# Altium PCB touch-24-v6-serang.PcbDoc
Units mm, origin at the board's own origin, x right, y up, seen from the top; angles counter-clockwise.
Board outline 151 x 86.38 mm, 2 copper layers (Top Layer, Bottom Layer); 92 components, 81 nets, 231 pads, 53 vias.
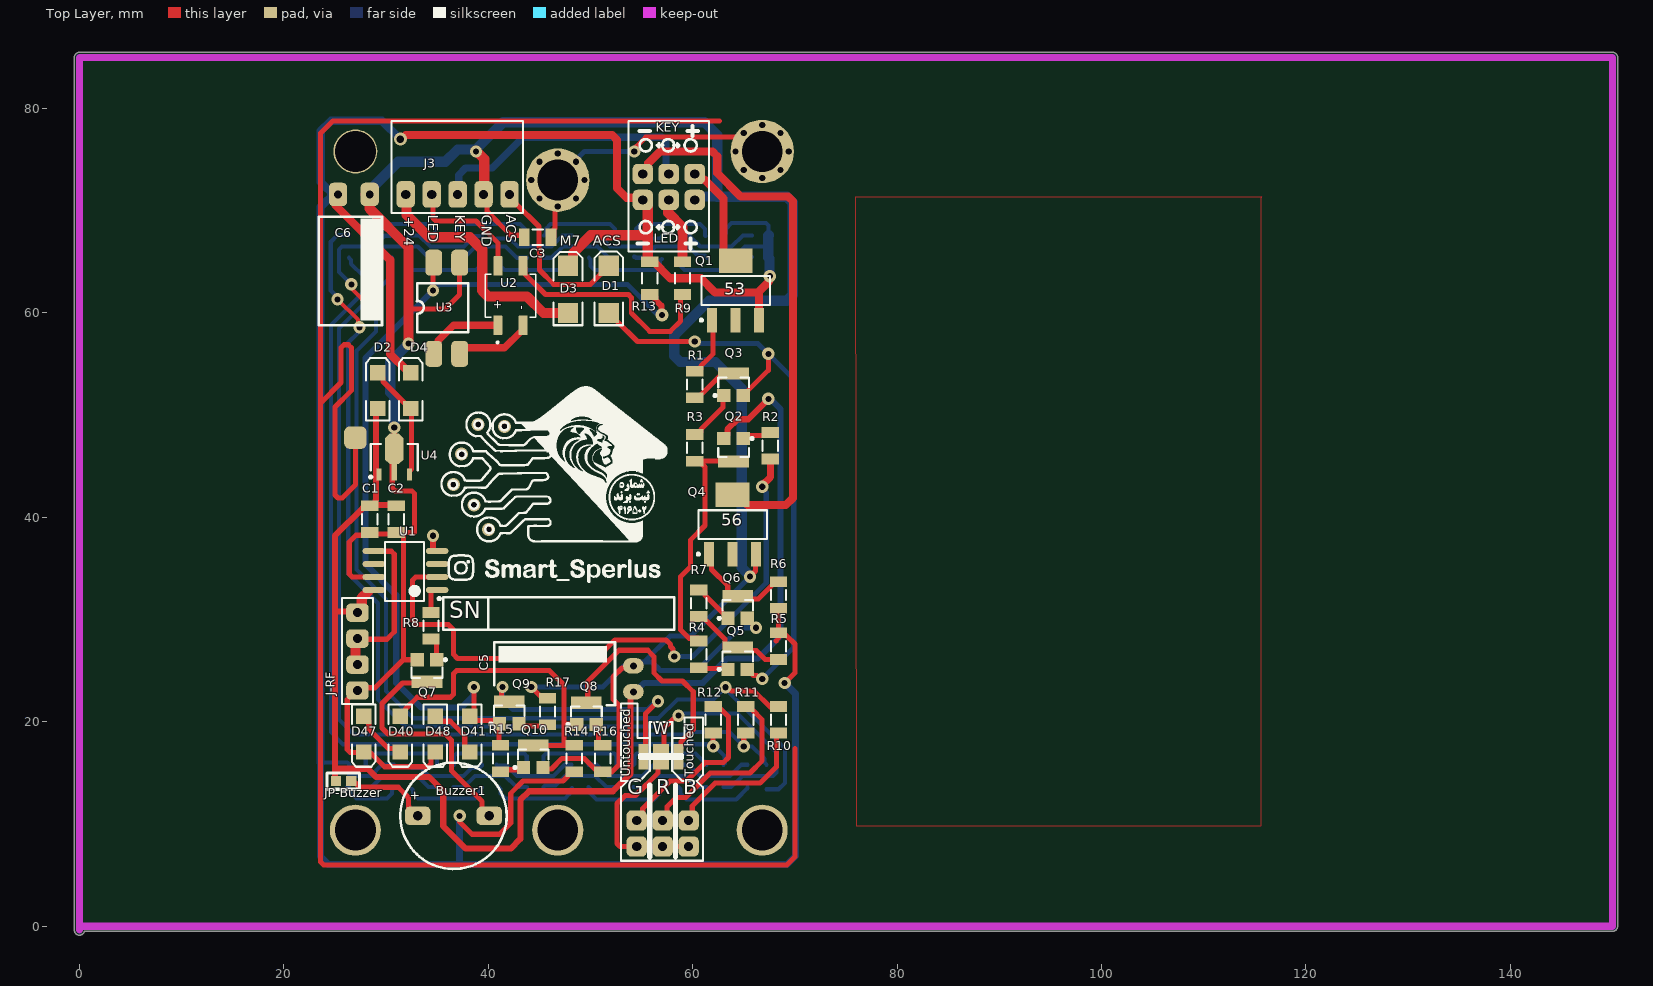
[diagram p0: Top Layer view]
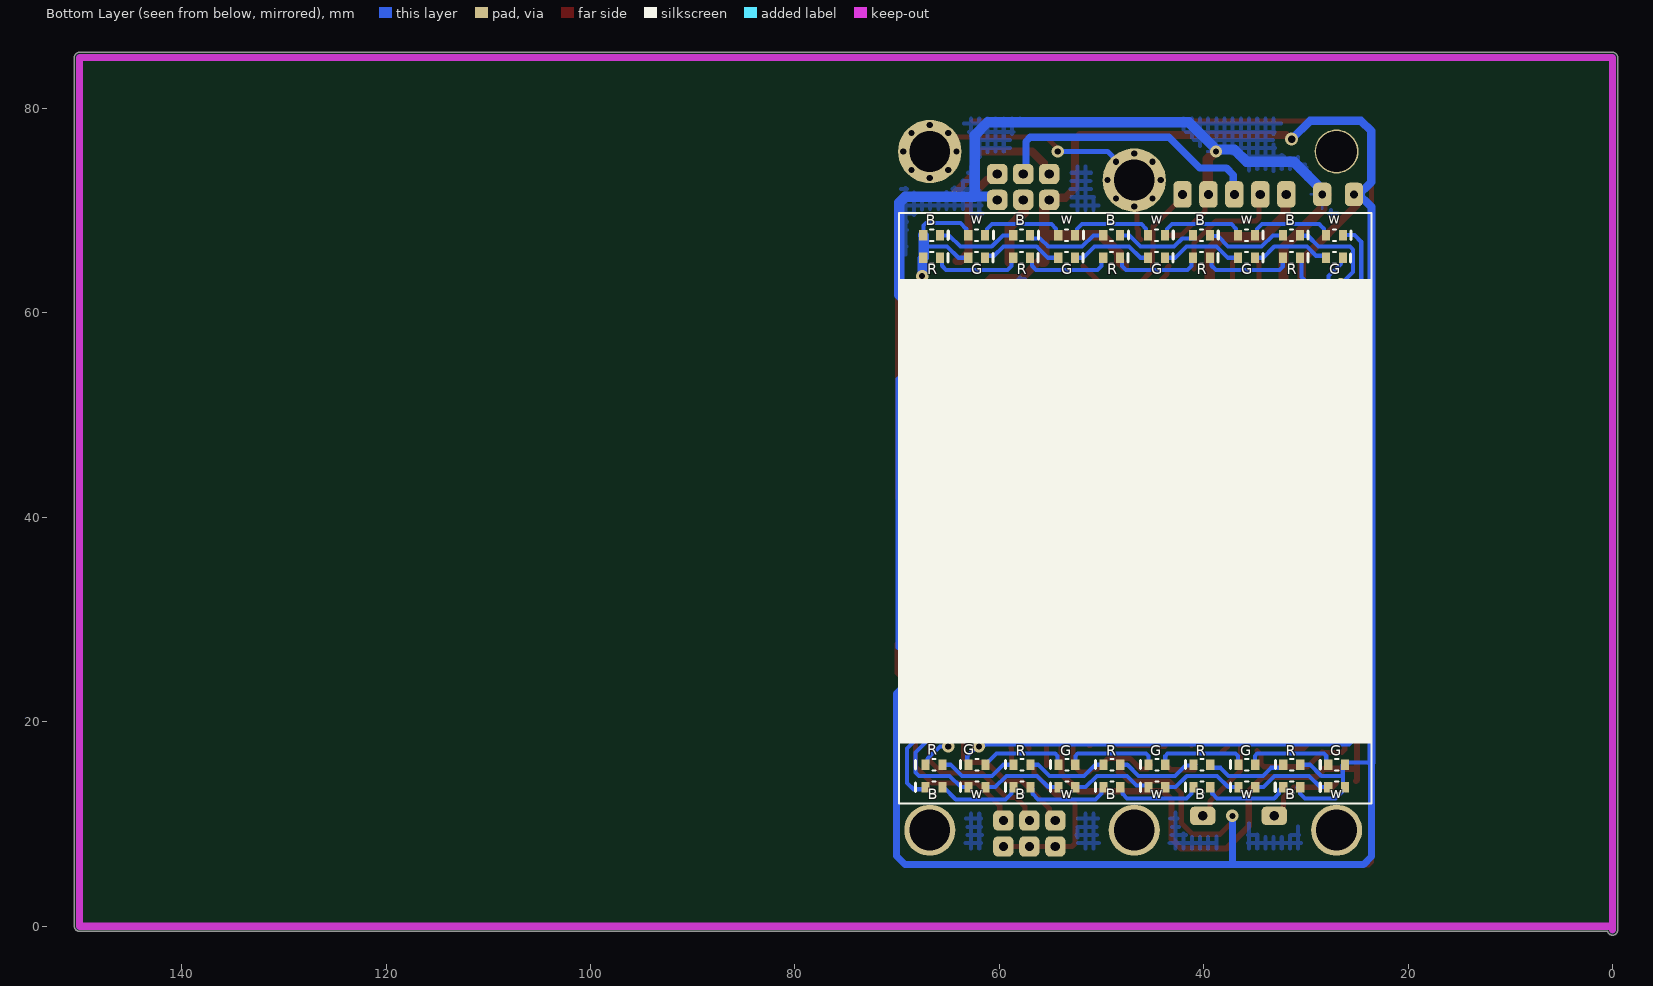
[diagram p1: Bottom Layer view, seen from below]

## Layer stack, top to bottom
Top Solder: solder mask 0.0102, Solder Resist, Dk 3.5
Top Layer: signal copper 0.0356
Dielectric 1: dielectric 0.32, FR-4, Dk 4.8
Bottom Layer: signal copper 0.0356
Bottom Solder: solder mask 0.0102, Solder Resist, Dk 3.5

## Board outline
-0.5,-0.381 -0.5,85 cw(c0,85) 0,85.5 150,85.5 cw(c150,85) 150.5,85 150.5,0 cw(c150,0) 150,-0.5 0.486,-0.5 cw(c0,-0.381)

## Design rules (kind name [scope] priority, off if disabled: settings)
Clearance Clearance_1 [InPolygon] p1: gap=1 ignorepadtopadclearanceinfootprint=FALSE
Clearance [All] p2: gap=0.4 ignorepadtopadclearanceinfootprint=FALSE
PolygonConnect [All] p1: connectstyle=Relief reliefconductorwidth=0.254 reliefentries=4 polygonreliefangle="90 Angle" airgapwidth=0.254
RoomDefinition touch-24-v6-serang [InComponentClass('touch-24-v6-serang')] p1: confinementstyle=ConfineIn formatcopy=TRUE lockcomponents=FALSE outline 151.564,0.523 157.564,0.523 157.564,12.323 151.564,12.323
RoutingLayers [All] p1: top layer_v5=FALSE bottom layer_v5=TRUE
RoutingVias [All] p1: holewidth=0.711 width=2.5 viastyle="Through Hole" minholewidth=0.711 minwidth=1.27 maxholewidth=0.711 maxwidth=2
SolderMaskExpansion [All] p1: expansion=0.102 istentingtop=FALSE
Width [All] p1: maxlimit=3 minlimit=0.4 preferedwidth=1
29 further rules are at their usual default settings.

## Classes and differential pairs
component class touch-24-v6-serang: B Buzzer1 C1 C2 C3 C5 C6 D1 D2 D3 D4 D40 D41 D47 D48 G J3 J8 JP? P5 P7 Q1 Q2 Q3 Q4 Q5 Q6 Q7 Q8 Q9 Q10 R R1 R2 R3 R4 R5 R6 R7 R8 R9 R10 R11 R12 R13 R14 R15 R16 R17 R22 U1 U2 U3 U4 U17 w

## Components (designator, comment, footprint, x,y, rotation, side; value= is the part's Value field where it differs from the comment)
B "LED2" "RES 0805 (2012X06L)" 66.4,13.6 r0 bottom (schematic designator 4)
B "LED2" "RES 0805 (2012X06L)" 57.8,13.6 r0 bottom (schematic designator 4)
B "LED2" "RES 0805 (2012X06L)" 49,13.6 r0 bottom (schematic designator 4)
B "LED2" "RES 0805 (2012X06L)" 40.2,13.6 r0 bottom (schematic designator 4)
B "LED2" "RES 0805 (2012X06L)" 31.4,13.6 r0 bottom (schematic designator 4)
B "LED2" "RES 0805 (2012X06L)" 31.4,67.6 r180 bottom (schematic designator 4)
B "LED2" "RES 0805 (2012X06L)" 40.2,67.6 r180 bottom (schematic designator 4)
B "LED2" "RES 0805 (2012X06L)" 49,67.6 r180 bottom (schematic designator 4)
B "LED2" "RES 0805 (2012X06L)" 57.8,67.6 r180 bottom (schematic designator 4)
B "LED2" "RES 0805 (2012X06L)" 66.6,67.6 r180 bottom (schematic designator 4)
Buzzer1 "Buzzer" BUZZER 36.6,10.8 r0 top
C1 "=Value" "CAP 1206" 28.4,39.8 r90 top
C2 "=Value" "CAP 1206" 31,39.8 r90 top
C3 "=Value" "CAP 1206" 44.8,67.4 r0 top
C5 "=Value" ELEC-CAP-RAD10-20 54.2,24.2 r270 top
C6 "=Value" ELEC-CAP-RAD15-30 26.8,69.6 r180 top
D1 "D Tunnel1" 3.2X1.6X1.1#1 51.8,61.8 r90 top
D2 "D Tunnel1" 3.2X1.6X1.1#2 29.2,52.4 r90 top
D3 "D Tunnel1" 3.2X1.6X1.1#3 47.8,62 r90 top
D4 "D Tunnel1" 3.2X1.6X1.1#2 32.4,52.4 r90 top
D40 "D Tunnel1" 3.2X1.6X1.1#2 31.4,18.8 r270 top
D41 "D Tunnel1" 3.2X1.6X1.1#2 38.2,18.8 r270 top
D47 "D Tunnel1" 3.2X1.6X1.1#2 27.8,18.8 r270 top
D48 "D Tunnel1" 3.2X1.6X1.1#2 34.8,18.8 r270 top
G "LED2" "RES 0805 (2012X06L)" 27.2,65.4 r180 bottom (schematic designator 3)
G "LED2" "RES 0805 (2012X06L)" 35.8,65.4 r180 bottom (schematic designator 3)
G "LED2" "RES 0805 (2012X06L)" 44.6,65.4 r180 bottom (schematic designator 3)
G "LED2" "RES 0805 (2012X06L)" 53.4,65.4 r180 bottom (schematic designator 3)
G "LED2" "RES 0805 (2012X06L)" 62.2,65.4 r180 bottom (schematic designator 3)
G "LED2" "RES 0805 (2012X06L)" 62.2,15.8 r0 bottom (schematic designator 3)
G "LED2" "RES 0805 (2012X06L)" 53.4,15.8 r0 bottom (schematic designator 3)
G "LED2" "RES 0805 (2012X06L)" 44.6,15.8 r0 bottom (schematic designator 3)
G "LED2" "RES 0805 (2012X06L)" 35.8,15.8 r0 bottom (schematic designator 3)
G "LED2" "RES 0805 (2012X06L)" 27,15.8 r0 bottom (schematic designator 3)
J1 "Header3X2" "HEADER 3X2" 55.12,73.6 r0 top
J3 "Header5X1" "HEADER 5X1" 31.92,71.6 r0 top
J4 "Header3X2" "HEADER 3X2" 59.6,7.8 r180 top
J-RF "Header4X1" "HEADER 4X1" 27.2,30.68 r270 top (schematic designator J2)
JP2 "Jumper Selector" "Jumper Selector"#1 59.38,15.8 r180 top
JP3 "Jumper Selector" "Jumper Selector"#2 59.44,17.4 r180 top
JP-Buzzer "Jumper" "Header 2X1" 25.8,14.2 r180 top (schematic designator JP1)
Q1 "MOSFET-P4" SOT223_N 64.2,62.2 r90 top
Q2 "PNP" SOT-23B_N 64,46.6 r270 top
Q3 "QNPN" SOT-23B_L 64,53 r90 top
Q4 "MOSFET-P4" SOT223_N 63.9,39.3 r90 top
Q5 "QNPN" SOT-23B_L 64.4,26.2 r90 top
Q6 "QNPN" SOT-23B_L 64.4,31.2 r90 top
Q7 "QNPN" SOT-23B_L 34,25 r270 top
Q8 "QNPN" SOT-23B_L 49.6,20.8 r90 top
Q9 "QNPN" SOT-23B_L 42.05,20.875 r90 top
Q10 "QNPN" SOT-23B_L 44.4,16.6 r90 top
R "LED2" "RES 0805 (2012X06L)" 31.4,65.4 r180 bottom (schematic designator 2)
R "LED2" "RES 0805 (2012X06L)" 40.2,65.4 r180 bottom (schematic designator 2)
R "LED2" "RES 0805 (2012X06L)" 49,65.4 r180 bottom (schematic designator 2)
R "LED2" "RES 0805 (2012X06L)" 57.8,65.4 r180 bottom (schematic designator 2)
R "LED2" "RES 0805 (2012X06L)" 66.6,65.4 r180 bottom (schematic designator 2)
R "LED2" "RES 0805 (2012X06L)" 66.4,15.8 r0 bottom (schematic designator 2)
R "LED2" "RES 0805 (2012X06L)" 57.8,15.8 r0 bottom (schematic designator 2)
R "LED2" "RES 0805 (2012X06L)" 49,15.8 r0 bottom (schematic designator 2)
R "LED2" "RES 0805 (2012X06L)" 40.2,15.8 r0 bottom (schematic designator 2)
R "LED2" "RES 0805 (2012X06L)" 31.4,15.8 r0 bottom (schematic designator 2)
R1 "10K" "RES 1206 (3216X08L)"#1 60.2,53 r90 top
R2 "10K" "RES 1206 (3216X08L)"#1 67.6,47 r90 top
R3 "10K" "RES 1206 (3216X08L)"#1 60.2,46.8 r90 top
R4 "10K" "RES 1206 (3216X08L)"#1 60.6,26.6 r270 top
R5 "10K" "RES 1206 (3216X08L)"#1 68.4,27.4 r90 top
R6 "10K" "RES 1206 (3216X08L)"#1 68.4,32.4 r90 top
R7 "10K" "RES 1206 (3216X08L)"#1 60.6,31.6 r90 top
R8 "10K" "RES 1206 (3216X08L)"#1 34.4,29.4 r270 top
R9 "10K" "RES 1206 (3216X08L)"#2 59,63.4 r270 top
R10 "10K" "RES 1206 (3216X08L)"#1 68.4,20.2 r90 top
R11 "10K" "RES 1206 (3216X08L)"#1 65.2,20.2 r270 top
R12 "10K" "RES 1206 (3216X08L)"#1 62,20.2 r270 top
R13 "10K" "RES 1206 (3216X08L)"#2 55.8,63.4 r90 top
R14 "10K" "RES 1206 (3216X08L)"#1 48.4,16.4 r270 top
R15 "10K" "RES 1206 (3216X08L)"#1 41.2,16.4 r270 top
R16 "10K" "RES 1206 (3216X08L)"#1 51.2,16.4 r90 top
R17 "10K" "RES 1206 (3216X08L)"#1 45.8,21 r270 top
U1 "ATtiny15L-1SC" 8S2_N 31.8,34.8 r180 top
U2 "MB6S" SOIC245P670X270-4N 42.175,61.7 r90 top
U3 "PC817" DIP4 34.66,56.7 r90 top
U4 "LM1117MP-3.3" SOT89L 30.8,45.9 r90 top
w "LED2" "RES 0805 (2012X06L)" 27.2,67.6 r180 bottom (schematic designator 1)
w "LED2" "RES 0805 (2012X06L)" 35.8,67.6 r180 bottom (schematic designator 1)
w "LED2" "RES 0805 (2012X06L)" 44.6,67.6 r180 bottom (schematic designator 1)
w "LED2" "RES 0805 (2012X06L)" 53.4,67.6 r180 bottom (schematic designator 1)
w "LED2" "RES 0805 (2012X06L)" 62.2,67.6 r180 bottom (schematic designator 1)
w "LED2" "RES 0805 (2012X06L)" 62.2,13.6 r0 bottom (schematic designator 1)
w "LED2" "RES 0805 (2012X06L)" 53.4,13.6 r0 bottom (schematic designator 1)
w "LED2" "RES 0805 (2012X06L)" 44.6,13.6 r0 bottom (schematic designator 1)
w "LED2" "RES 0805 (2012X06L)" 35.8,13.6 r0 bottom (schematic designator 1)
w "LED2" "RES 0805 (2012X06L)" 27,13.6 r0 bottom (schematic designator 1)

## Footprints (in the part's own frame and the unit in brackets; to place one, negate y for a bottom-side part, rotate by r counter-clockwise, add the part's x,y. Pads: shape width x height; smd on the part's side, far side on the other; paste and mask are expansions set on the pad)
3.2X1.6X1.1#1 [mm] "SMT LED; 2 Flat Leads"
  rect 2x2 smd: 1(-1.8,0) 2(2.8,0)
  silkscreen extent -3,-1.4 4.2,1.4
3.2X1.6X1.1#2 [mm] "SMT LED; 2 Flat Leads"
  rect 1.5x1.5 smd: 1(-1.75,0) 2(1.75,0)
  silkscreen extent -2.9,-1.15 3.2,1.15
3.2X1.6X1.1#3 [mm] "SMT LED; 2 Flat Leads"
  rect 2x2 smd: 1(-2,0) 2(2.6,0)
  silkscreen extent -3.2,-1.4 3.95,1.4
8S2_N [mm] "SOP, 8-Leads, Body 5.3x5.3mm, Pitch 1.27mm, IPC Medium Density"
  oval 2.2x0.6 smd: 1(-3.2,1.905) 2(-3.2,0.635) 3(-3.2,-0.635) 4(-3.2,-1.905) 5(3,-1.905) 6(3,-0.635) 7(3,0.635) 8(3,1.905)
  silkscreen extent -3.52,-2.8 1.9,3, body extent -2.73,-2.75 2.73,2.75, height 2.16
BUZZER [mm] "BUZZER"
  rrect50% 2.5x1.8 hole 0.9: 1(-3.5,0) 2(3.5,0)
  silkscreen extent -5.2,-5.2 5.2,5.2
"CAP 1206" [mm]
  rect 1.05x1.7 smd: 1(-1.27,0) 2(1.326,0)
  silkscreen extent -0.47,-0.75 0.53,0.75, body extent -1.49,-0.77 1.55,0.75, height 0.75
DIP4 [mm]
  rrect50% 2.54x1.651 smd: 1(-0.7,0) 2(-0.7,-2.54) 3(8.22,-2.54) 4(8.22,0)
  silkscreen extent 1.42,-3.4 6.22,1.65, body extent -0.13,-3.56 7.75,1.03, height 4.3
ELEC-CAP-RAD10-20 [mil] "Chip Capacitor, 2-Leads, Body 3.2x1.6mm, IPC High Density, chip Tantalum"
  oval 60x80 hole 27.56: 1(-50,0) 2(50,0)
  body extent -124,-124 124,124, height 404
ELEC-CAP-RAD15-30 [mil]
  rrect50% 70x90 hole 30: 1(-62.99,-78.74) 2(59.06,-78.74)
  silkscreen extent -108,16 -29,406, body extent -167,-167 167,167, height 609
"Header 2X1" [mm]
  rect 1x1 smd: 1(-0.8,0) 2(0.7,0)
  silkscreen extent -1.6,-0.8 1.6,0.8, body extent -2.54,-1.27 2.54,1.27, height 9.5
"HEADER 3X2" [mm]
  rrect50% 2x2 hole 0.9: 1(0,0) 2(0,-2.54) 3(2.54,0) 4(2.54,-2.54) 5(5.08,0) 6(5.08,-2.54)
  silkscreen extent -1.4,-7.6 6.48,5.2, body extent -1.3,-3.81 6.32,1.27, height 8.38
"HEADER 4X1" [mm]
  rrect50% 1.8x2.2 hole 0.9: 1(0,0) 2(2.54,0) 3(5.08,0) 4(7.62,0)
  silkscreen extent -1.43,-1.5 8.92,1.5, body extent -1.19,-1.22 8.97,1.32, height 8.38
"HEADER 5X1" [mm]
  rrect50% 1.8x2.6 hole 0.9: 1(0,0) 2(2.54,0) 3(5.08,0) 4(7.62,0) 5(10.16,0)
  silkscreen extent -1.4,-1.8 11.46,7.2, body extent -1.22,-1.19 11.48,1.35, height 8.38
"Jumper Selector"#1 [mm]
  rect 1.6x0.9 smd: 1(2.48,0)
  rect 1x0.9 smd: 2(0.78,0) 3(4.18,0)
  body extent -1.24,-1.27 6.38,1.27, height 10.16
"Jumper Selector"#2 [mm]
  rect 1.6x0.9 smd: 1(2.54,0)
  rect 1x0.9 smd: 2(0.84,0) 3(4.24,0)
  body extent -1.24,-1.27 6.38,1.27, height 10.16
"RES 0805 (2012X06L)" [mm] "Chip Resistor, 2-Leads, Body 2.0x1.3mm, IPC High Density _ (0.100 W)"
  rect 0.8x1 smd: 1(-0.838,0) 2(0.812,0)
  silkscreen extent -0.16,-0.55 0.14,0.55, body extent -1.03,-0.63 1,0.64, height 0.6
"RES 1206 (3216X08L)"#1 [mm] "Chip Resistor, 2-Leads, Body 3.2x1.6mm, IPC High Density _ (0.125 W)"
  rect 1.05x1.7 smd: 1(-1.295,0) 2(1.301,0)
  silkscreen extent -0.5,-0.75 0.5,0.75, body extent -1.52,-0.76 1.53,0.76, height 0.6
"RES 1206 (3216X08L)"#2 [mm] "Chip Resistor, 2-Leads, Body 3.2x1.6mm, IPC High Density _ (0.125 W)"
  rect 1.05x1.7 smd: 1(-1.6,0) 2(1.6,0)
  silkscreen extent -0.5,-0.75 0.5,0.75, body extent -1.52,-0.76 1.53,0.76, height 0.6
SOIC245P670X270-4N [mm]
  rrect23% 1.91x0.91 smd: 1(-2.9,1.225) 2(-2.9,-1.225) 3(2.9,-1.225) 4(2.9,1.225)
  silkscreen extent -4.68,-2.48 2.1,2.48
SOT89L [mm] "SOT89, 3-Leads, Body 4.5x2.4 mm, Pitch 1.5mm, Lead Span 4.1mm, IPC High Density"
  rect 1.2x0.5 smd: 1(-1.7,1.5) 3(-1.7,-1.5)
  rect 1.6x0.5 smd: 2(-1.5,0)
  oct 3x1.8 smd: 2(0.8,0)
  silkscreen extent -2.07,-2.3 1.3,2.42, body extent -1.3,-2.3 1.3,2.3, height 1.6
SOT223_N [mm] "SOT223, 4-Leads, Body 6.5x3.5mm, Pitch 2.3mm, Lead Span 7mm, IPC Medium Density"
  rect 2.4x1 smd: 1(-2.9,2.3) 2(-2.9,0) 3(-2.9,-2.3)
  rect 2.4x3.3 smd: 4(2.9,0)
  silkscreen extent -3.02,-3.35 1.4,3.47, body extent -1.85,-3.35 1.85,3.35, height 1.7
SOT-23B_L [mm] "SOT23, 3-Leads, Body 2.9x1.3mm, Pitch 0.95mm, Lead Span 2.4mm, IPC High Density"
  rect 1.3x1.3 smd: 1(-1.075,0.95) 2(-1.075,-0.95)
  rect 1.2x3 smd: 3(1.075,0)
  silkscreen extent -1.2,-1.5 0.7,1.92, body extent -0.7,-1.5 0.7,1.5, height 1.14
SOT-23B_N [mm] "SOT23, 3-Leads, Body 2.9x1.3mm, Pitch 0.95mm, Lead Span 2.4mm, IPC Medium Density"
  rect 1.3x1.3 smd: 1(-1.125,0.95) 2(-1.125,-0.95)
  rect 1.2x3 smd: 3(1.125,0)
  silkscreen extent -1.25,-1.5 0.7,1.93, body extent -0.7,-1.5 0.7,1.5, height 1.14

## Part data
B B B B B B B B B B G G G G G G G G G G R R R R R R R R R R w w w w w w w w w w: "Typical RED, GREEN, YELLOW, AMBER GaAs LED", LatestRevisionDate=17-Jul-2002, LatestRevisionNote="Re-released for DXP Platform.", PackageDescription="SM LED; 2 Flat Leads", PackageReference=3.2X1.6X1.1, PackageVersion=Feb-2002, Published=8-Jun-2000, Publisher="Altium Limited"
C1 C2 C3: library part Capacitor, "Capacitor"
C5 C6: library part "Capacitor Electrolytic", "Electrolytic Capacitor"
D1 D2 D3 D4 D40 D41 D47 D48: "Tunnel Diode - RLC Model", LatestRevisionDate=17-Jul-2002, LatestRevisionNote="Re-released for DXP Platform.", PackageDescription="SM LED; 2 Flat Leads", PackageReference=3.2X1.6X1.1, PackageVersion=Feb-2002, Published=8-Jun-2000, Publisher="Altium Limited"
Q1 Q4: "P-Channel MOSFET, Externally Terminated Substrate", Code_IPC=SOT223-4, Code_JEDEC=TO-261-AA-B, Code_JEITA=SC-75, LatestRevisionDate=29-May-2009, LatestRevisionNote="IPC-7351 Footprint Added.", PackageDescription="4-Pin SOT-223 Package 2.3 mm Pitch, 7 mm Lead Span", PackageReference=SOT223, PackageVersion=2002, Published=24-Mar-1999, Publisher="Altium Limited"
Q2: "PNP Bipolar Transistor", LatestRevisionDate=29-May-2009, LatestRevisionNote="IPC-7351 Footprint Added.", PackageDescription="3-Pin SOT-23 Package 0.95 mm Pitch, 2.4 mm Lead Span", PackageReference=SOT-23B, PackageVersion=Aug-1999, Published=8-Jun-2000, Publisher="Altium Limited"
Q3 Q5 Q6 Q7 Q8 Q9 Q10: "NPN Bipolar Transistor", LatestRevisionDate=29-May-2009, LatestRevisionNote="IPC-7351 Footprint Added.", PackageDescription="3-Pin SOT-23 Package 0.95 mm Pitch, 2.4 mm Lead Span", PackageReference=SOT-23B, PackageVersion=Aug-1999, Published=8-Jun-2000, Publisher="Altium Limited"
R1 R2 R3 R4 R5 R6 R7 R8 R9 R10 R11 R12 R13 R14 R15 R16 R17: library part Resistor, "Resistor", Power="1/4 W", Tolerance=5%
U1: "8-Bit AVR Microcontroller with 1K Byte of Flash Memory", Supplier Part Number 1=ATTINY15L-1SC-ND, ComponentLink1Description=Datasheet, ComponentLink1URL=http://www.atmel.com/dyn/resources/prod_documents/doc1187.pdf, ComponentLink2Description="Atmel.com Home", ComponentLink2URL=http://www.atmel.com, DatasheetVersion=1187E-AVR-06/02, LatestRevisionDate=16-Oct-2006, LatestRevisionNote="IPC-7351 Footprint Added.", PackageDescription="8-Lead, 0.208\" Body, Plastic Small Outline Package (EIAJ)", PackageReference=8S2, PackageVersion="revF, Apr-2008", Published=17-Sep-2003, Publisher="Altium Limited", Supplier 1=Digi-Key, Supplier 2=Mouser, Supplier Part Number 2=556-ATTINY15L1SC
U2: "Bridge Rectifier Single Phase Standard 600V Surface Mount 4-SOIC", Package="BESOP-4 Surge Components", Digi-Key_Part_Number=MB6SCT-ND, Digi-Key_Purchase_URL=https://www.digikey.com.tr/product-detail/en/on-semiconductor/MB6S/MB6SCT-ND/965654?utm_source=snapeda&utm_medium=aggregator&utm_campaign=symbol, MF="ON Semiconductor", MP=MB6S, SnapEDA_Link=https://www.snapeda.com/parts/MB6S/ON%20Semiconductor/view-part/2774209/?ref=snap
U3: library part OPTCOUPLER_01, "4-Pin Phototransistor Optocoupler"
U4: "800mA Low-Dropout Linear Regulator", DigiKeyPartNumber=LM1117MP-3.3CT-ND, Manufacturer="National Semiconductor", PackageTopMarking=XYTT*N05A, PowerWise=N, Code_IPC=SOT223-4, Code_JEDEC=TO-261-AA, ComponentLink1Description="LM1117 Datasheet", ComponentLink1URL=http://www.national.com/ds/LM/LM1117.pdf, ComponentLink2Description="LM1117 Web Page", ComponentLink2URL=http://www.national.com/pf/LM/LM1117.html, ComponentLink3Description="MP04A Package Page", ComponentLink3URL=http://www.national.com/packaging/folders/mp04a.html, CompType="LDO IC", DatasheetVersion=Apr-2006, PackageDescription="Molded SOT-223, 6.50 x 3.56 x 1.6mm Body, 4 Lead, 2.3mm Pitch", PackageReference=MP04A, PackageVersion="revB, Apr-2003", PartNumber=LM1117MP-3.3, PinCount=4, Published=4-Dec-2008, Publisher="Altium Limited", RoHS=O
Buzzer1: ComponentLinkURL=www.picpars.com, Designer="Seyed Mohsen Ghasemain"

## Free pads (board coordinates)
  round 4.3 hole 4: 2(27,75.8)
  round 5 hole 4: 2(66.8,9.4) 3(27,9.4) 4(46.8,9.4)
  round 6.2 hole 4: 5(46.8,73) 5(66.8,75.8)
  round 32 smd far side: 6(47.2,42.2)
  rrect50% 2.2x2.2 smd: 7(27,47.8)

## Via types
v1: diameter 1.2, hole 0.6, Top Layer to Bottom Layer, 29 vias
v2: diameter 0.9, hole 0.6, Top Layer to Bottom Layer, 8 vias
v3: diameter 1, hole 0.6, Top Layer to Bottom Layer, 8 vias
v4: diameter 1.27, hole 0.6, Top Layer to Bottom Layer, 7 vias
v5: diameter 1.27, hole 0.711, Top Layer to Bottom Layer, 1 vias

## Nets (pads, with @x,y where several pads share a name; then routed paths per layer and width w, separated by ;. In a path a pad name is that pad's centre, name@x,y a point inside that pad or via, vN(x,y) a via of type N, cw(c..) or ccw(c..) an arc to the next point about the centre after c; other vN are vias at no path point)
ACS: D1.2 J3.5 | length 16.9
  Top Layer w0.5: J3.5@41.68,71.308 42.315,70.673 42.727,70.673 44.951,68.449 44.951,66.049 45,66 45,64.2 46.4,62.8 50,62.8 D1.2
bizer: R8.1 U1.1 | length 2.8
  Top Layer w0.5: R8.1 34.4,32.849 34.446,32.895 U1.1
data-rf: J-RF.2 J-RF.3 U1.5 | length 15.5
  Top Layer w0.5: J-RF.2@27.2,28.08 30.08,28.08 30.8,28.8 30.8,36.393 30.507,36.686 U1.5@28.827,36.686
  Top Layer w1: J-RF.3@27,26.31 27,27.94 J-RF.2
GND: C1.1 C2.1 C3.1 C5.1 C6.1 D47.2 D48.2 J1.6 J3.4 J-RF.4 Q4.3 Q6.2 Q7.2 Q10.2 R16.1 R17.1 U1.7 U3.3 U4.2 | length 274.3
  Top Layer w0.5: D47.2@28.275,16.925 28.2,17 26.493,17 26.2,17.293 26.2,22.152 27.377,23.329 28.929,23.329 31.7,26.1 ; D47.2@28.4,17.05 29.85,15.6 34.104,15.6 34.396,15.893 34.396,16.777 D48.2@34.8,17.181 ; C1.1@28.946,38.309 28.725,38.53 C1.1 28.125,38.255 27.055,38.255 26.4,37.6 26.4,34.458 26.693,34.165 U1.7@29.365,34.165 ; C1.1@29,38.362 C2.1@31,38.362 ; U4.2@30.6,46.7 30.6,42.893 30.893,42.6 32.507,42.6 32.8,42.307 32.8,38.53 C2.1@31.7,38.53 ; U4.2@30.8,46.7 v1(30.8,48.8) ; C2.1 C2.1@31.7,38.53 ; 32.2,60.4 35.8,60.4 37.2,61.8 U3.3 ; Q7.2 31.7,26.075 C2.1@31.7,38.53 ; J3.4@39.569,71.171 39.869,70.871 39.869,69.931 42.2,67.6 C3.1@43.552,67.6 ; v1(44.2,23.4) 44.21,23.4 45.04,22.57 45.2,22.57 45.305,22.465 R17.1@45.305,22.305 ; Q10.2@45.2,15.8 45.35,15.65 Q10.2 ; Q10.2@45.5,15.375 46.175,15.375 47.2,16.4 49.4,16.4 50.42,15.38 50.925,15.38 R16.1 52.105,15.105 52.8,15.8 52.8,21.6 52.2,22.2 52.2,24.4 53.074,25.274 53.604,25.274 C5.1@53.8,25.47 ; Q6.2@65.4,30.2 65.6,30 65.6,29.843 66.2,29.243 v1(66.2,29.2) ; v1(65.6,34.2) 66.143,34.743 66.143,36.343 Q4.3
  Top Layer w1: C6.1@28,71.6 28.389,71.211 28.389,70.211 32.2,66.4 32.2,60.4 v1(32.2,57) ; v1(38.8,75.8) 38.854,75.8 39.596,75.059 39.6,75.059 39.6,71.66 J3.4
  Bottom Layer w0.5: v1(44.2,23.4) 51.2,23.4 53.27,25.47 C5.1@53.8,25.47 ; C5.1@54.213,25.866 55.266,25.866 ; 56.3,25.5 55.934,25.866 55.266,25.866 ; 56.4,25.4 56.45,25.4 56.85,25 60.4,25 64.6,29.2 v1(66.2,29.2) ; v1(65.6,34.2) 59.8,28.4 57.8,28.4 55.266,25.866
  Bottom Layer w1: C6.1 28.789,71.989 28.789,72.389 31.2,74.8 35.8,74.8 37,76 38.546,76 38.746,75.8 v1(38.8,75.8) ; v1(30.8,48.8) 30.8,51.827 30.4,52.227 30.4,55.2 v1(32.2,57) ; v1@38.8,75.892 38.838,75.892 38.838,76.038 41.45,78.65 61.15,78.65 62.4,77.4 62.4,71.365 69.214,71.365 69.8,70.779 69.8,61.786 69.214,61.2 61.6,61.2 58.2,57.8 58.2,55.786 58.786,55.2 62.2,55.2 64.8,52.6 64.8,35.086 65.6,34.286 v1(65.6,34.2) ; J1.6 60.54,71.4 62.4,71.4
key: J1.3 J3.3 | length 27.1
  Bottom Layer w0.7: J3.3 37.111,71.711 37.111,73.511 37.8,74.2 40.4,74.2 43.4,77.2 56.99,77.2 57.4,76.79 J1.3@57.4,73.6
key+: J1.5 Q1.4 | length 10.9
  Top Layer w0.8: J1.5@59.94,73.6 60.478,73.062 61.138,73.062 63,71.2 63,65.9 63.8,65.1 Q1.4
key-: J1.1 Q4.4 | length 54.1
  Top Layer w0.8: J1.1@55.066,73.6 J1.1@55.658,74.192 ; 55.658,74.658 56.8,75.8 61.931,75.8 62.4,75.331 62.4,73.697 64.697,71.4 69.331,71.4 69.8,70.931 69.8,41.893 69.107,41.2 65.35,41.2 64.35,42.2 Q4.4
L1: J4.1 J4.3 J4.5 JP2.1 | length 17.4
  Top Layer w0.5: JP2.1@57.1,15.8 56.82,15.8 56.62,15.6 56.62,15.02 54.4,12.8 53.4,12.8 52.6,12 52.6,8.093 52.893,7.8 J4.5 J4.3 J4.1
L11: R11.2 R.2@30.588,65.4 R.2@67.212,15.8 | length 92.6
  Top Layer w0.5: R11.2@64.934,18.765 65,18.699 v1(65,17.6)
  Bottom Layer w0.4: R.2@30.588,65.4 30.42,65.232 30.42,63.517 25.4,58.497 25.4,20.22 26.87,18.75 59.15,18.75 59.4,19 63.6,19 v1(65,17.6) 65.8,17.6 67.012,16.388 67.012,16 R.2@67.212,15.8
L12: G.2@26.388,65.4 G.2@63.012,15.8 R12.2 | length 90
  Top Layer w0.5: v1(62,17.6) R12.2
  Bottom Layer w0.4: G.2@26.388,65.4 26.588,65.2 26.588,64.812 27.8,63.6 27.8,62.028 24.6,58.828 24.6,19 25.8,17.8 61.366,17.8 61.413,17.753 61.73,17.753 61.883,17.6 62.2,17.6 63.134,16.666 63.134,15.923 G.2@63.012,15.8
L13: B.2@30.588,67.6 B.2@67.212,13.6 R10.2 | length 107
  Top Layer w0.4: v1(26.6,62.8) 26.753,62.647 26.753,62.247 28.447,60.553 28.447,60.153 v1(28.6,60)
  Top Layer w0.5: v1(63.219,23.381) 63.409,23.381 63.789,23 66.032,23 67.566,21.467 R10.2@67.733,21.467
  Bottom Layer w0.4: v1(26.6,62.8) 25.388,64.012 25.388,66.188 25.7,66.5 28.769,66.5 29.823,67.554 30.388,67.554 B.2@30.388,67.6 ; v1(28.6,60) 28.6,59.784 29,59.384 29,58.2 27.1,56.3 27.1,34.9 30,32 30,23 32.65,20.35 56.647,20.35 58.497,22.2 62.038,22.2 v1@63.2,23.362 ; v1(63.219,23.381) v1@63.2,23.362 ; B.2@67.212,13.4 68.4,13.4 69.012,14.012 69.012,17.388 63.2,23.2 v1@63.2,23.362
led: D41.1 Q9.1 R13.1 R15.1 U3.4 | length 89.4
  Top Layer w0.5: v1(34.6,62.2) 34.6,64.86 U3.4 ; D41.1 38.587,20.937 v1(38.587,23.387) ; D41.1@38.575,20.45 38.9,20.125 40.7,20.125 41.05,19.775 41.05,17.845 R15.1
  Top Layer w0.6: R13.1@55.849,61.8 56.125,61.8 56.35,61.575 56.35,61.299 56.939,60.71 56.939,59.861 v4(57,59.8)
  Bottom Layer w0.5: v1(34.6,62.2) 34.643,62.2 35.243,62.8 53.6,62.8 56.453,59.947 56.853,59.947 v4(57,59.8)
  Bottom Layer w0.6: v1(34.6,62.2) 28,55.6 28,35.4 31,32.4 31,23.8 33.4,21.4 37.4,21.4 38.527,22.527 38.527,23.327 v1(38.587,23.387)
"led IN": J3.2 U2.4 | length 12.2
  Top Layer w0.5: J3.2 34.6,71.46 34.6,69.293 34.893,69 38.8,69 40.936,66.864 U2.4@40.936,64.331
Lw: JP3.1 w.2@26.388,67.6 w.2@63.012,13.6 | length 103.5
  Top Layer w0.4: v1(25.25,61.336) 27.247,59.339 27.247,58.753 v1(27.4,58.6)
  Top Layer w0.5: JP3.1@57.1,17.4 57.1,17.5 57.2,17.6 57.2,19.4 58.4,20.6 v1(58.6,20.6)
  Bottom Layer w0.4: v1(25.25,61.336) 25.25,61.552 24.588,62.214 24.588,66.966 25.234,67.612 26.376,67.612 w.2@26.388,67.6 ; v1(27.4,58.6) 27.247,58.447 27.247,58.047 26.3,57.1 26.3,34.5 29.2,31.6 29.2,22.2 31.85,19.55 57.37,19.55 58.42,20.6 v1(58.6,20.6) ; v1@58.656,20.544 58.911,20.8 64.4,20.8 68.212,16.988 68.212,15.051 67.86,14.7 64.862,14.7 63.763,13.6 w.2@63.012,13.6
Net1_1: w.1@28.038,67.6 w.2@34.988,67.6 | length 8.4
  Bottom Layer w0.4: w.1@28.038,67.6 28.238,67.8 28.238,68.238 28.7,68.7 34.3,68.7 34.788,68.212 34.788,67.8 w.2@34.988,67.6
Net1_1: w.1@36.638,67.6 w.2@43.788,67.6 | length 8.6
  Bottom Layer w0.4: w.1@36.638,67.6 36.838,67.8 36.838,68.238 37.3,68.7 43.1,68.7 43.588,68.212 43.588,67.8 w.2@43.788,67.6
Net1_1: w.1@45.438,67.6 w.2@52.588,67.6 | length 8.6
  Bottom Layer w0.4: w.1@45.438,67.6 45.638,67.8 45.638,68.238 46.1,68.7 51.9,68.7 52.388,68.212 52.388,67.8 w.2@52.588,67.6
Net1_1: w.1@54.238,67.6 w.2@61.388,67.6 | length 8.6
  Bottom Layer w0.4: w.1@54.238,67.6 54.438,67.8 54.438,68.238 54.9,68.7 60.7,68.7 61.188,68.212 61.188,67.6 w.2@61.272,67.516
Net1_1: w.1@61.362,13.6 w.2@54.212,13.6 | length 8.1
  Bottom Layer w0.4: w.2@54.212,13.6 55.213,13.6 56.313,14.7 59.3,14.7 60.4,13.6 w.1@61.362,13.6
Net1_1: w.1@52.562,13.6 w.2@45.412,13.6 | length 8.1
  Bottom Layer w0.4: w.2@45.412,13.6 45.576,13.764 46.577,13.764 47.513,14.7 49.68,14.7 50.46,14.7 51.556,13.604 52.558,13.604 w.1@52.562,13.6
Net1_1: w.1@43.762,13.6 w.2@36.612,13.6 | length 8.1
  Bottom Layer w0.4: w.2@36.612,13.6 37.6,13.6 38.7,14.7 40.363,14.7 41.66,14.7 42.76,13.6 w.1@43.762,13.6
Net1_1: w.1@34.962,13.6 w.2@27.812,13.6 | length 8.1
  Bottom Layer w0.4: w.2@27.812,13.6 28.6,13.6 29.7,14.7 33.072,14.7 34.168,13.604 34.958,13.604 w.1@34.962,13.6
Net2_1: R.1@32.238,65.4 R.2@39.388,65.4 | length 8.7
  Bottom Layer w0.4: R.1@32.266,65.173 32.266,64.534 32.6,64.2 38.8,64.2 39.22,64.62 39.22,65.208 R.2@39.4,65.388
Net2_1: R.1@41.038,65.4 R.2@48.188,65.4 | length 8.8
  Bottom Layer w0.4: R.1@41.038,65.4 41.2,65.238 41.2,64.6 41.6,64.2 47.6,64.2 48,64.6 48,65.1 48.132,65.232 R.2@48.22,65.232
Net2_1: R.1@49.838,65.4 R.2@56.988,65.4 | length 8.8
  Bottom Layer w0.4: R.1@49.838,65.4 50,65.238 50,64.6 50.4,64.2 56.4,64.2 56.82,64.62 56.82,65.132 R.2@56.972,65.284
Net2_1: R.1@58.638,65.4 R.2@65.788,65.4 | length 9
  Bottom Layer w0.4: R.1@58.638,65.4 58.793,65.245 58.793,64.607 59.2,64.2 65.2,64.2 65.62,64.62 65.62,65.29 R.2@65.8,65.47
Net2_1: R.1@65.562,15.8 R.2@58.612,15.8 | length 7.7
  Bottom Layer w0.4: R.2@58.612,15.8 59.6,15.8 60.7,14.7 63.66,14.7 64.76,15.8 R.1@65.362,15.8
Net2_1: R.1@56.962,15.8 R.2@49.812,15.8 | length 7.7
  Bottom Layer w0.4: R.2@49.812,15.8 50.6,15.8 51.7,14.7 55.1,14.7 56.2,15.8 56.562,15.8
Net2_1: R.1@48.162,15.8 R.2@41.012,15.8 | length 8.1
  Bottom Layer w0.4: R.2@40.812,15.8 R.2@40.898,15.714 ; R.2@41.098,15.714 41.777,15.714 42.792,14.7 46.382,14.7 47.482,15.8 R.1@48.162,15.8
Net2_1: R.1@39.362,15.8 R.2@32.212,15.8 | length 7.8
  Bottom Layer w0.4: R.2@32.424,15.6 32.524,15.5 33.403,15.5 34.203,14.7 37.569,14.7 38.369,15.5 39.162,15.5 39.374,15.712 R.1@39.374,15.8
Net3_1: G.1@28.038,65.4 G.2@34.988,65.4 | length 7.2
  Bottom Layer w0.4: G.1@28.232,65.593 28.237,65.599 28.999,65.599 29.9,66.5 33.1,66.5 34.2,65.4 G.2@34.588,65.4
Net3_1: G.1@36.638,65.4 G.2@43.788,65.4 | length 8.1
  Bottom Layer w0.4: G.1@36.638,65.488 36.75,65.488 36.838,65.4 37.64,65.4 38.74,66.5 41.7,66.5 42.8,65.4 G.2@43.788,65.4
Net3_1: G.1@45.438,65.4 G.2@52.588,65.4 | length 8.1
  Bottom Layer w0.4: G.1@45.438,65.4 45.442,65.404 46.204,65.404 47.3,66.5 50.7,66.5 51.8,65.4 G.2@52.588,65.4
Net3_1: G.1@54.238,65.4 G.2@61.388,65.4 | length 8.1
  Bottom Layer w0.4: G.1@54.242,65.504 54.334,65.504 54.438,65.4 55.24,65.4 56.34,66.5 59.608,66.5 60.508,65.6 61.188,65.6 G.2@61.388,65.4
Net3_1: G.1@61.362,15.8 G.2@54.212,15.8 | length 8.6
  Bottom Layer w0.4: G.2@54.212,15.8 54.295,15.883 54.295,16.666 54.529,16.9 60.262,16.9 61.062,16.1 61.162,16.1 61.362,15.9 G.1@61.362,15.8
Net3_1: G.1@52.562,15.8 G.2@45.412,15.8 | length 9.1
  Bottom Layer w0.4: G.2@45.412,15.8 45.412,16.666 45.646,16.9 52.327,16.9 52.562,16.666 G.1@52.562,15.8
Net3_1: G.1@43.762,15.8 G.2@36.612,15.8 | length 9
  Bottom Layer w0.4: G.2@36.65,15.8 36.65,16.666 36.884,16.9 43.527,16.9 43.762,16.666 G.1@43.762,15.8
Net3_1: G.1@34.962,15.8 G.2@27.812,15.8 | length 8.9
  Bottom Layer w0.4: G.2@28.012,15.8 28.012,16.666 28.246,16.9 34.766,16.9 35,16.666 G.1@35,15.8
Net4_1: B.1@65.562,13.6 B.2@58.612,13.6 | length 8
  Bottom Layer w0.4: B.2@58.612,13.6 58.812,13.4 58.812,12.988 59.4,12.4 64.262,12.4 65.362,13.5 B.1@65.362,13.6
Net4_1: B.1@56.962,13.6 B.2@49.812,13.6 | length 8.8
  Bottom Layer w0.4: B.2@49.812,13.6 50.012,13.4 50.012,12.988 50.6,12.4 56.2,12.4 56.762,12.962 56.762,13.469 B.1@57,13.707
Net4_1: B.1@48.162,13.6 B.2@41.012,13.6 | length 8.5
  Bottom Layer w0.4: B.2@41.024,13.6 41.212,13.412 41.212,12.988 41.7,12.5 47.5,12.5 47.962,12.962 47.962,13.3 48.182,13.52 B.1@48.199,13.52
Net4_1: B.1@39.362,13.6 B.2@32.212,13.6 | length 8.1
  Bottom Layer w0.4: B.2@32.524,13.4 32.624,13.3 32.624,12.976 33.1,12.5 38.7,12.5 39.162,12.962 39.162,13.331 B.1@39.4,13.569
Net4_1: B.1@32.238,67.6 B.2@39.388,67.6 | length 8.1
  Bottom Layer w0.4: B.1@32.238,67.6 33.24,67.6 34.34,66.5 37.608,66.5 38.623,67.514 39.302,67.514 B.2@39.388,67.6
Net4_1: B.1@41.038,67.6 B.2@48.188,67.6 | length 8.1
  Bottom Layer w0.4: B.1@40.838,67.3 42.1,67.3 42.9,66.5 46.169,66.5 47.264,67.596 B.2@48.196,67.596
Net4_1: B.1@49.838,67.6 B.2@56.988,67.6 | length 8
  Bottom Layer w0.4: B.1@50.038,67.6 50.042,67.596 50.804,67.596 51.9,66.5 55.208,66.5 56.008,67.3 56.788,67.3 B.2@57.118,67.63
Net4_1: B.1@58.638,67.6 B.2@65.788,67.6 | length 8.1
  Bottom Layer w0.4: B.1@58.638,67.4 58.838,67.6 59.64,67.6 60.74,66.5 63.808,66.5 64.908,67.6 B.2@65.788,67.6
NetBuzzer1_1: Buzzer1.1 JP-Buzzer.1 | length 8.1
  Top Layer w0.5: JP-Buzzer.1@27,14 27.4,13.6 31.2,13.6 32.2,12.6 32.2,11.743 32.223,11.719 32.223,11.435 32.858,10.8 Buzzer1.1
NetBuzzer1_2: Buzzer1.2 Q7.3 | length 23.9
  Top Layer w0.5: Q7.3@34,23.8 31.6,23.8 29.6,21.8 29.6,19.4 30.2,18.8 35.8,18.8 36.4,18.2 36.4,15.2 39.4,12.2 39.4,11.435 40.035,10.8 Buzzer1.2
NetC4_2: U1.6
NetD1_1: D1.1 Q3.2 Q5.2 | length 59
  Top Layer w0.5: D1.1 52.05,59.75 52.05,59.25 52.55,59.25 54.6,57.2 v1(60.2,57.2) ; Q3.2@64.65,51.825 64.825,51.825 65.075,52.075 65.1,52.075 65.2,52.175 65.2,52.2 67.4,54.4 v1(67.4,56) ; Q5.2 65.941,24.534 66.277,24.534 66.611,24.2 v1(66.8,24.2)
  Bottom Layer w0.5: v1@60,57 66.4,57 v1(67.4,56) 69.885,53.515 69.885,27.285 v1(66.8,24.2)
NetD2_2: D2.2 D4.1 U4.3 | length 11.1
  Top Layer w0.5: D2.2 29.7,53.65 29.7,53.3 31.9,51.1 31.9,51.15 D4.1 ; U4.3 32.3,44.55 32.496,44.746 32.496,50.154 D4.1@32.4,50.25
NetD3_1: D3.1 J3.1 | length 24.2
  Top Layer w1: J3.1 32,71.52 32,69.6 34.2,67.4 38.2,67.4 39.4,66.2 39.4,62.186 39.986,61.6 43.8,61.6 45.4,60 D3.1
NetD40_1: D40.1 Q8.1 Q10.3 R14.1 | length 31.5
  Top Layer w0.5: D40.1 31.9,21.05 31.9,21.25 33.05,22.4 36.307,22.4 36.6,22.693 36.6,24.707 36.893,25 46,25 47.4,23.6 47.4,19.8 ; Q10.3@44.049,17.6 43.8,17.6 43.825,17.625 44.272,17.625 44.343,17.695 R14.1 ; 47.4,18 47.4,19.8 ; Q8.1 48.575,19.8 47.4,19.8
NetD40_2: D40.2 D47.1 | length 5.5
  Top Layer w0.5: D47.1 28.3,20.05 28.3,19.3 30.195,17.405 31.045,17.405 D40.2
NetD41_2: D41.2 D48.1 | length 5.6
  Top Layer w0.5: D48.1@34.5,20.05 36.281,20.05 37.7,18.631 37.7,17.55 D41.2
NetJ1_4: J1.4 R9.1 | length 5.9
  Top Layer w1: J1.4@57.6,70.32 57.6,69.8 59,68.4 R9.1
NetJ4_2: J4.2 R10.1 | length 14.8
  Top Layer w0.5: J4.2 59.954,10.694 59.954,11.754 62.2,14 66.6,14 68.2,15.6 68.2,18.705 R10.1
NetJ4_4: J4.4 R11.1 | length 18.9
  Top Layer w0.5: J4.4 57.484,10.764 57.484,11.684 58.4,12.6 59.32,12.6 61.72,15 65.6,15 66.8,16.2 66.8,20.2 65.8,21.2 65.8,21.22 65.62,21.4 R11.1@65.071,21.4
NetJ4_6: J4.6 R12.1 | length 18.2
  Top Layer w0.5: J4.6 55.114,10.934 55.114,11.514 57.8,14.2 59.4,14.2 61.2,16 63,16 63.5,16.5 63.5,20.5 62.77,21.23 61.866,21.23 R12.1@61.6,21.495
NetJP2_2: JP2.2 JP3.2 Q8.3 | length 23.7
  Top Layer w0.5: Q8.3@49.4,21.8 49.732,22.132 49.732,23.932 52.8,27 55.6,27 56.2,26.4 56.2,24.8 57,24 59,24 60.05,22.95 60.05,19.25 58.85,18.05 58.85,17.45 58.8,17.4 JP2.2@58.8,16.2
NetJP2_3: JP2.3 JP3.3 Q9.3 | length 26
  Top Layer w0.5: v1(41.4,23.4) 41.298,23.298 41.298,22.3 41.648,21.95 Q9.3 ; JP2.3@55.4,15.705 55.4,17.4 55.4,20.8 v1(56.6,22)
  Bottom Layer w0.5: v1(41.4,23.4) 41.4,22.2 42.4,21.2 55.611,21.2 56.411,22 v1(56.6,22)
NetQ1_1: Q1.1 R1.2 | length 5.6
  Top Layer w0.5: R1.2@60.23,54.23 60.455,54.23 60.8,54.576 60.8,54.8 62,56 Q1.1@62,59
NetQ2_1: Q2.3 R3.1 R4.1 | length 24.3
  Top Layer w0.5: R4.1@60.617,28 60.447,28.17 59.63,28.17 58.8,29 58.8,34.2 59.8,35.2 59.8,37.8 61.2,39.2 61.2,44.937 60.907,45.23 60.8,45.23 60.725,45.305 60.725,45.505 Q2.3@65.069,45.505
NetQ2_2: Q2.1 R2.2 | length 2.5
  Top Layer w0.5: Q2.1@65.2,47.975 65.225,48 66.974,48 67.275,48.301 R2.2
NetQ3_1: Q3.3 R1.1 | length 3.4
  Top Layer w0.5: R1.1@60.588,51.768 60.8,51.98 62.545,53.725 62.75,53.725 Q3.3@62.75,54.125
NetQ3_2: Q3.1 R3.2 | length 5.2
  Top Layer w0.5: R3.2 60.525,48.101 60.8,48.376 60.8,48.6 62.968,50.768 62.968,51.843 Q3.1
NetQ4_1: Q4.1 Q6.3 R6.2 | length 9.3
  Top Layer w0.5: Q4.1@61.8,35.971 61.85,35.921 61.85,34.911 63.429,33.332 63.429,32.625 64.036,32.018 66.418,32.018 67.8,33.4 67.8,33.426 67.828,33.453 R6.2@67.853,33.453
NetQ5_1: Q5.3 R5.1 R7.1 | length 9.8
  Top Layer w0.5: R7.1@61.03,30.2 61.2,30.03 63.15,28.08 63.15,27.225 63.418,26.957 66.243,26.957 67.093,26.107 68.493,26.107 R5.1@68.6,26
NetQ5_2: Q5.1 R4.2 | length 3.3
  Top Layer w0.5: R4.2@60.155,25.2 62.975,25.2 63.05,25.125 Q5.1
NetQ6_2: Q6.1 R7.2 | length 4.3
  Top Layer w0.5: R7.2@60.4,32.8 61.026,32.8 61.2,32.626 61.2,32.375 63.2,30.375 Q6.1
NetQ7_2: Q7.1 R8.2 | length 2.4
  Top Layer w0.5: R8.2 34.675,28.099 34.95,27.824 Q7.1
NetQ8_3: Q8.2 R16.2 | length 2.4
  Top Layer w0.5: Q8.2 50.8,19.475 50.8,17.976 51.075,17.701 R16.2
NetQ9_3: Q9.2 R17.2 | length 2.7
  Top Layer w0.5: Q9.2@43.2,19.6 R17.2@45.939,19.6
NetQ10_2: Q10.1 R15.2 | length 2.6
  Top Layer w0.5: R15.2@40.893,15.307 43.232,15.307 Q10.1
NetR9_2: R9.2 U2.3 | length 22.3
  Top Layer w0.5: U2.3 43.605,64.395 43.605,63.795 45.6,61.8 53.707,61.8 54,61.507 54,60 55.8,58.2 57.8,58.2 58.8,59.2 R9.2@58.8,61.8
NetU2_1: U2.1 U3.1 | length 7.6
  Top Layer w0.7: U3.1@35,56.204 35.097,56.301 35.097,57.297 36.6,58.8 U2.1
NetU2_2: U2.2 U3.2 | length 8.9
  Top Layer w0.7: U3.2 37.2,56.059 36.965,56.294 36.729,56.529 U3.2@37.2,56.529 ; U3.2@37.2,56.6 41.6,56.6 43.195,58.195 43.295,58.195 43.4,58.3 U2.2 U2.2@43.4,59.094
out: R2.1 U1.2 | length 61.8
  Top Layer w0.5: U1.2 32.893,34.165 32.6,33.872 32.6,29.893 32.972,29.52 36.08,29.52 36.6,29 36.6,26.6 37,26.2 50.58,26.2 52.38,28 57.4,28 57.822,27.578 57.822,27.367 58.066,27.123 58.066,26.534 v1(58.2,26.4)
  Top Layer w0.7: v1(66.8,43) 66.8,43.135 67.6,43.935 67.6,45.53 67.425,45.705 R2.1@67.2,45.705
  Bottom Layer w0.5: v1(58.2,26.4) 60,26.4 67.2,33.6 67.2,42.411 66.8,42.811 v1(66.8,43)
touch: pad.6 U1.4 | length 2.4
  Top Layer w0.4: v1(34.6,38.2) 34.6,38 v1@34.8,37.8
  Top Layer w0.6: v1(34.6,38.2) 34.6,36.705 U1.4
  other v4: 40,38.8 38.6,41.2 36.6,43.2 37.4,46.2 41.6,48.9 39,49.1
vcc: C1.2 C2.2 C5.2 D2.1 J-RF.1 JP-Buzzer.2 Q2.2 U1.8 U4.1 | length 140.4
  Top Layer w0.6: JP-Buzzer.2 25,14.3 25,15.4 ; J-RF.1@27.2,30.48 26.88,30.8 25,30.8 ; C1.2 28.725,41.126 28.95,41.351 28.95,41.652 29,41.702 29,50.2 29.26,50.439 ccw(c28.663,50.382) D2.1 ; C2.2@31.2,41.2 28.8,41.2 28.4,41.2 28.101,40.901 27.701,40.901 25,38.2 25,30.8 ; C5.2@53.93,22.833 53.93,14.93 52.2,13.2 44,13.2 43.15,12.35 43.15,8.55 42.2,7.6 37.8,7.6 35.6,9.8 35.6,13.2 34.2,14.6 29,14.6 28.2,15.4 25,15.4 ; Q2.2@63.213,47.888 63.4,48.075 63.4,48.6 64.4,49.6 65.442,49.6 67.4,51.558 v1(67.4,51.6) ; 25,15.4 25,30.8
  Top Layer w1: J-RF.1@27.2,30.48 27.629,30.909 27.629,32.123 U1.8@28.2,32.695
  Bottom Layer w0.6: C5.2 54.397,22.93 55.267,23.8 61,23.8 63.4,26.2 66.4,26.2 68.6,28.4 68.6,50.6 67.6,51.6 v1(67.4,51.6)
vdd: B.1@30.562,13.6 B.1@67.438,67.6 C6.2 D3.2 D4.2 G.1@26.162,15.8 G.1@63.038,65.4 J1.2 Q1.3 R5.2 R6.1 R13.2 R14.2 R.1@30.562,15.8 R.1@67.438,65.4 w.1@26.162,13.6 w.1@63.038,67.6 | length 289.6
  Top Layer w0.5: v1(37.2,10.8) 37.2,10.2 38.4,9 41.106,9 42.2,10.094 42.2,13 43.4,14.2 47.307,14.2 47.8,14.693 47.8,14.824 48.075,15.099 R14.2 ; 68.162,27.901 68.2,27.939 ; R5.2@68.4,28.202 R5.2 R6.1@68.4,31.325 ; R5.2@68.994,28.606 68.994,28.431 69,28.426 69.174,28.426 70,27.6 70,24.8 v1(69,23.8)
  Top Layer w0.8: C6.2@24.8,71.8 C6.2@25,71.6 ; C6.2@25.062,71.138 25.062,70.538 30.4,65.2 30.4,56 D4.2@32.039,54.361 ; v5@31.617,77.09 31.927,77.4 52.131,77.4 52.6,76.931 52.6,72.2 53.528,71.272 54.908,71.272 J1.2 ; R13.2 55.8,65.08 56.12,65.08 57.8,63.4 60.8,63.4 62.2,62 66.5,62 Q1.3 ; 66.5,62.1 67.473,63.073 67.473,63.523 v1(67.55,63.6)
  Top Layer w1: D3.2 48.3,65.1 48.3,65.864 50.036,67.6 55.6,67.6 ; J1.2 55.6,70.58 55.6,67.6 ; R13.2 55.625,65 55.6,65.025 55.6,67.6
  Bottom Layer w0.4: 23.6,16 26.2,16 26.4,15.8 26.4,14.934 ; w.1@26.162,13.6 26.362,13.4 26.362,13.238 26.562,13.038 27.1,12.5 30.1,12.5 30.574,12.974 30.574,13.334 B.1@30.8,13.56 ; w.1@26.362,13.6 G.1@26.362,15.8 ; 26.4,14.7 28.5,14.7 29.6,15.8 30.562,15.8 R.1@30.774,15.8 ; w.1@63.038,67.6 63.238,67.8 63.238,68.238 63.8,68.8 67.166,68.8 67.4,68.566 67.4,67.638 B.1@67.438,67.6 ; G.1@63.438,65.4 63.442,65.404 64.004,65.404 65.1,66.5 67.4,66.5 67.438,66.5 R.1@67.438,65.4
  Bottom Layer w0.7: 23.588,15.988 23.588,6.812 24.35,6.05 37.2,6.05 ; v1(37.2,10.8) 37.2,6.05 ; v1(69,23.8) 70.05,22.75 70.05,6.86 69.24,6.05 37.2,6.05
  Bottom Layer w0.8: 23.6,16 23.588,15.988 23.588,70.388 24.057,70.857 24.087,70.857 24.6,71.37 24.6,71.83 24.087,72.343 24.069,72.343 23.6,72.812 23.6,77.8 24.6,78.8 29.6,78.8 v5(31.4,77)
  Bottom Layer w1: B.1@67.438,67.6 67.4,67.562 67.4,66.5 67.4,65.438 67.438,65.4 67.512,65.326 67.512,63.638 v1(67.55,63.6)
pads on no net: C3.2 Q1.2 Q4.2 U1.3
copper on no net: | length 226
  Top Layer w0.5: 23.6,51.2 25.6,53.2 25.6,56.6 25.893,56.893 26.307,56.893 26.6,56.6 26.6,55.4 26.6,52.4 25,50.8 25,42.2 25.293,41.907 25.707,41.907 27,43.2 27,47.8 ; 46.126,67.174 46.401,67.449 46.401,68.151 46.543,68.293 46.543,70.343 46.6,70.4 46.6,73 ; v1@54.11,75.904 54.467,76.262 54.467,76.267 55.4,77.2 64.6,77.2 ; 62.6,78.8 24.8,78.8 23.6,77.6 23.6,6.293 23.893,6 69.2,6 70,6.8 70,8.145 70,17.4 ; 64.6,76.952 65.352,76.952 65.4,77
  Bottom Layer w0.5: 46.8,74.2 46.8,73 v3(48.6,74.8) ; v3@48.4,74.8 49.4,75.8 v1(54.276,75.8)
  other v2: 66.8,73.2 65,74 68.6,74 64.2,75.8 69.4,75.8 65,77.6 68.6,77.6 66.8,78.4
  other v3: 46.8,70.4 45,71.2 48.6,71.2 44.2,73 49.4,73 45,74.8 46.8,75.6

## Polygon pours and split planes (outlines as drawn)
GND on Top Layer "NONET_L01_P024" (hatched 90Degree grid 0.5 track 0.2, shelved, pour order 24): 75.946,71.374 115.697,71.374 115.57,71.247 115.57,9.779 76.073,9.779
GND on Bottom Layer "GND_L02_P026" (hatched 90Degree grid 0.8 track 0.4, pour order 26): 23.2,79 69.6,79 69.6,6 23.401,6

## Keep-outs
Keep-Out Layer:
  lines w0.7: 0,-0.381 0,85 150,85 150,0 0,0

## Silkscreen, mask and mechanical layers (free items; w line width, h text height)
Top Overlay:
  drawing of 119 lines, arcs and shapes, not listed
  text "KEY" at 56.4,77.416 h1.52
  text "LED" at 33.8,69.6 h1.7 r270
  text "KEY" at 36.418,69.6 h1.7 r270
  text "GND" at 39.018,69.6 h1.7 r270
  text "ACS" at 41.418,69.6 h1.7 r270
  text "+24" at 31.418,69.399 h1.7 r270
  text "LED" at 56.2,66.6 h1.52
  text "M7" at 47,66.218 h1.7
  text "ACS" at 50.2,66.218 h1.7
  text "53" at 63.1,61.4 h2
  text "56" at 62.8,38.8 h2
  text "SN" at 36.2,29.6 h2.8
  text "W" at 56.1,18.4 h2
  text "Untouched" at 54.184,14.6 h1.52 r90
  text "Touched" at 60.384,14.6 h1.52 r90
  text "G  R  B" at 53.6,12.4 h2.5
Bottom Overlay:
  rectangle: 23.6,18 69.8,63.2
  lines w0.2: 23.6,18 69.8,18 ; 23.6,63.2 69.8,63.2 ; 23.6,12 23.6,69.8 69.8,69.8 69.8,12 23.6,12
  lines w0.3: 25.6,67.2 25.6,68 ; 25.62,64.982 25.62,65.782 ; 28.6,13.2 28.6,14 ; 28.6,15.4 28.6,16.2 ; 29.78,67.218 29.78,68.018 ; 29.8,65 29.8,65.8 ; 32.98,15.418 32.98,16.218 ; 33,13.2 33,14 ; 34.18,67.218 34.18,68.018 ; 34.2,65 34.2,65.8 ; 37.38,15.418 37.38,16.218 ; 37.4,13.2 37.4,14 ; 38.58,67.218 38.58,68.018 ; 38.6,65 38.6,65.8 ; 41.78,15.418 41.78,16.218 ; 41.8,13.2 41.8,14 ; 42.98,67.218 42.98,68.018 ; 43,65 43,65.8 ; 46.18,15.418 46.18,16.218 ; 46.2,13.2 46.2,14 ; 47.38,67.218 47.38,68.018 ; 47.4,65 47.4,65.8 ; 50.58,15.418 50.58,16.218 ; 50.6,13.2 50.6,14 ; 51.78,67.218 51.78,68.018 ; 51.8,65 51.8,65.8 ; 54.98,15.418 54.98,16.218 ; 55,13.2 55,14 ; 56.18,67.218 56.18,68.018 ; 56.2,65 56.2,65.8 ; 59.38,15.418 59.38,16.218 ; 59.4,13.2 59.4,14 ; 60.58,67.218 60.58,68.018 ; 60.6,65 60.6,65.8 ; 63.78,15.418 63.78,16.218 ; 63.8,13.2 63.8,14 ; 64.98,67.218 64.98,68.018 ; 65,65 65,65.8 ; 65,67.2 65,68 ; 68.18,15.418 68.18,16.218 ; 68.2,13.2 68.2,14 ; 68.2,15.4 68.2,16.2
Drill Guide:
  lines w0.2: 22.914,5.385 70.539,5.385 70.539,79.553 22.914,79.553 22.914,5.385

## Text inside footprints (layer, text, board x,y; h text height)
Buzzer1: Top Overlay "+" at 32.339,12.07 h1.52
U2: Top Overlay "-" at 43.575,60.3 h0.81 r90; Top Overlay "+" at 41.285,60.301 h0.81 r90